# EAGLE board tssop20breakout (EAGLE 7.4.0)
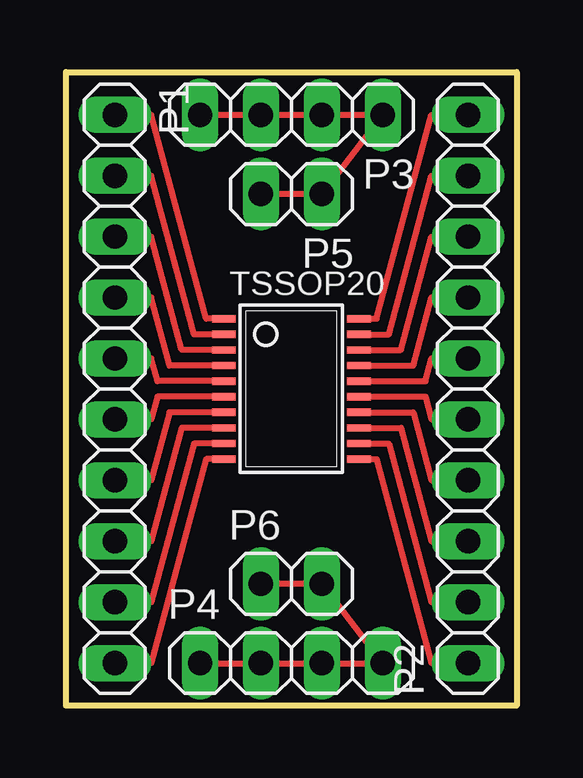
[diagram p0: board, top side]

Size 18.8 x 26.42 mm. Coordinates in mm from the lower left corner, seen from the top.
Outline: 0,26.42 18.8,26.42 18.8,0 0,0 0,26.42
Copper layers (1*16): Top 0.035mm / dielectric 1.5mm / Bottom 0.035mm
Design rules "default": minimum track width 10mil, minimum drill 24mil, track to track 8mil, track to pad 8mil, pad to pad 8mil, via to via 8mil, smd to smd 8mil, copper to edge 40mil, drill to drill 8mil, minimum pad ring 10mil, minimum via ring 8mil, stop-mask expansion 4mil, vias tented up to drill 0mil, thermal gap 10mil

## Footprints (pad centres in the part's own frame; a part is rotated, then mirrored left to right if it is on the bottom)
1X10 = drill 1.016 long: 1 -11.43,0; 2 -8.89,0; 3 -6.35,0; 4 -3.81,0; 5 -1.27,0; 6 1.27,0; 7 3.81,0; 8 6.35,0; 9 8.89,0; 10 11.43,0
1X04 = drill 1.016 long: 1 -3.81,0; 2 -1.27,0; 3 1.27,0; 4 3.81,0
1X02 = drill 1.016 long: 1 -1.27,0; 2 1.27,0
TSSOP20 = smd 0.305 x 0.991: 1 -2.925,-2.818; 2 -2.275,-2.818; 3 -1.625,-2.818; 4 -0.975,-2.818; 5 -0.325,-2.818; 6 0.325,-2.818; 7 0.975,-2.818; 8 1.625,-2.818; 9 2.275,-2.818; 10 2.925,-2.818; 11 2.925,2.818; 12 2.275,2.818; 13 1.625,2.818; 14 0.975,2.818; 15 0.325,2.818; 16 -0.325,2.818; 17 -0.975,2.818; 18 -1.625,2.818; 19 -2.275,2.818; 20 -2.925,2.818

## Placement (x,y rotation side)
P1  [1X10]  2.03,13.21 270 top
P2  [1X10]  16.76,13.21 90 top
P3  [1X04]  9.4,24.64 180 top
P4  [1X04]  9.4,1.78 0 top
P5  [1X02]  9.4,21.34 180 top
P6  [1X02]  9.4,5.08 0 top
TSSOP20  [TSSOP20]  9.4,13.21 270 top

## Library data of the parts
P1-P6 = pinhead
TSSOP20 = lsi-computer-systems

## Nets
S$1: P1.1 TSSOP20.1
S$2: P1.2 TSSOP20.2
S$3: P1.3 TSSOP20.3
S$4: P1.4 TSSOP20.4
S$5: P1.5 TSSOP20.5
S$6: P1.6 TSSOP20.6
S$7: P1.7 TSSOP20.7
S$8: P1.8 TSSOP20.8
S$9: P1.9 TSSOP20.9
S$10: P1.10 TSSOP20.10
S$11: P2.10 TSSOP20.20
S$12: P2.9 TSSOP20.19
S$13: P2.8 TSSOP20.18
S$14: P2.7 TSSOP20.17
S$15: P2.6 TSSOP20.16
S$16: P2.5 TSSOP20.15
S$17: P2.4 TSSOP20.14
S$18: P2.3 TSSOP20.13
S$19: P2.2 TSSOP20.12
S$20: P2.1 TSSOP20.11
S$21: P3.1 P3.2 P3.3 P3.4 P5.1 P5.2
S$22: P4.1 P4.2 P4.3 P4.4 P6.1 P6.2

## Tracks (layer width: path | path; a pad name or v marks a point on that pad's centre or on a via)
S$1
  Top 0.254: TSSOP20.1 5.84,16.13 3.56,24.64 P1.1
S$2
  Top 0.254: TSSOP20.2 5.33,15.48 3.56,22.1 P1.2
S$3
  Top 0.254: TSSOP20.3 4.83,14.83 3.56,19.56 P1.3
S$4
  Top 0.254: TSSOP20.4 4.32,14.18 3.56,17.02 P1.4
S$5
  Top 0.254: TSSOP20.5 3.81,13.53 3.56,14.48 P1.5
S$6
  Top 0.254: TSSOP20.6 3.81,12.88 3.56,11.94 P1.6
S$7
  Top 0.254: TSSOP20.7 4.32,12.23 3.56,9.4 P1.7
S$8
  Top 0.254: TSSOP20.8 4.83,11.58 3.56,6.86 P1.8
S$9
  Top 0.254: TSSOP20.9 5.33,10.93 3.56,4.32 P1.9
S$10
  Top 0.254: TSSOP20.10 5.84,10.28 3.56,1.78 P1.10
S$11
  Top 0.254: TSSOP20.20 12.95,16.13 15.24,24.64 P2.10
S$12
  Top 0.254: TSSOP20.19 13.46,15.48 15.24,22.1 P2.9
S$13
  Top 0.254: TSSOP20.18 13.97,14.83 15.24,19.56 P2.8
S$14
  Top 0.254: TSSOP20.17 14.48,14.18 15.24,17.02 P2.7
S$15
  Top 0.254: TSSOP20.16 14.99,13.53 15.24,14.48 P2.6
S$16
  Top 0.254: TSSOP20.15 14.99,12.88 15.24,11.94 P2.5
S$17
  Top 0.254: TSSOP20.14 14.48,12.23 15.24,9.4 P2.4
S$18
  Top 0.254: TSSOP20.13 13.97,11.58 15.24,6.86 P2.3
S$19
  Top 0.254: TSSOP20.12 13.46,10.93 15.24,4.32 P2.2
S$20
  Top 0.254: TSSOP20.11 12.95,10.28 15.24,1.78 P2.1
S$21
  Top 0.254: P3.4 P3.3 P3.2 P3.1 P5.1 P5.2
S$22
  Top 0.254: P4.1 P4.2 P4.3 P4.4 P6.2 P6.1